# Altium PCB pcb.PcbDoc
Units mm, origin at the board's own origin, x right, y up, seen from the top; angles counter-clockwise.
Board outline 127.89 x 65.53 mm, 2 copper layers (Top Layer, Bottom Layer); 26 components, 39 nets, 112 pads, 23 vias.
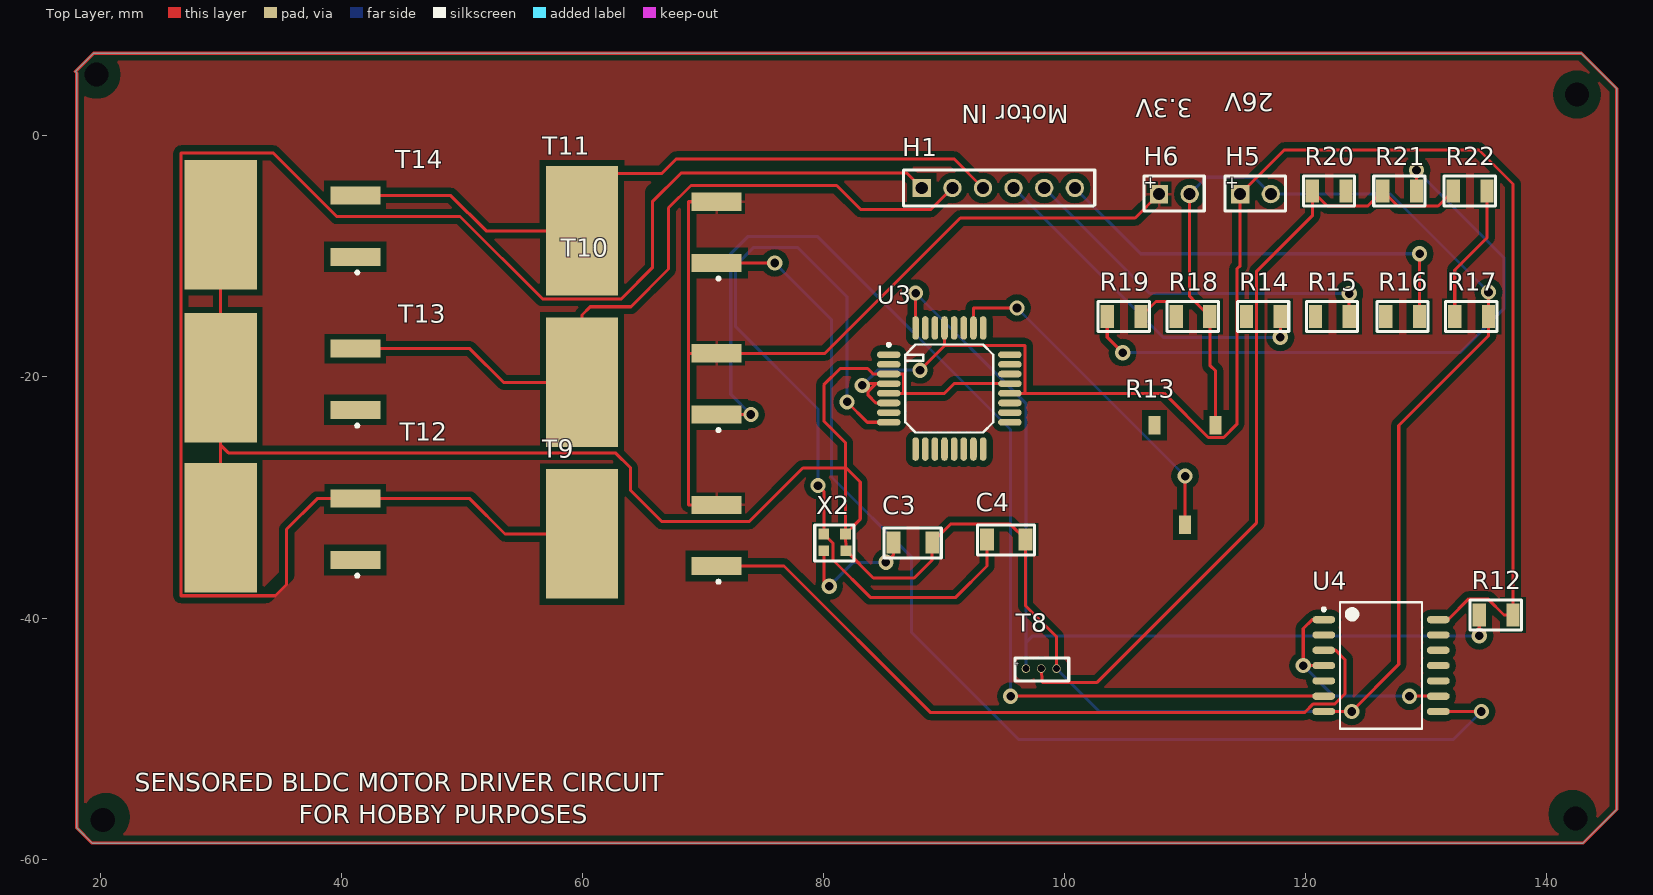
[diagram p0: Top Layer view]
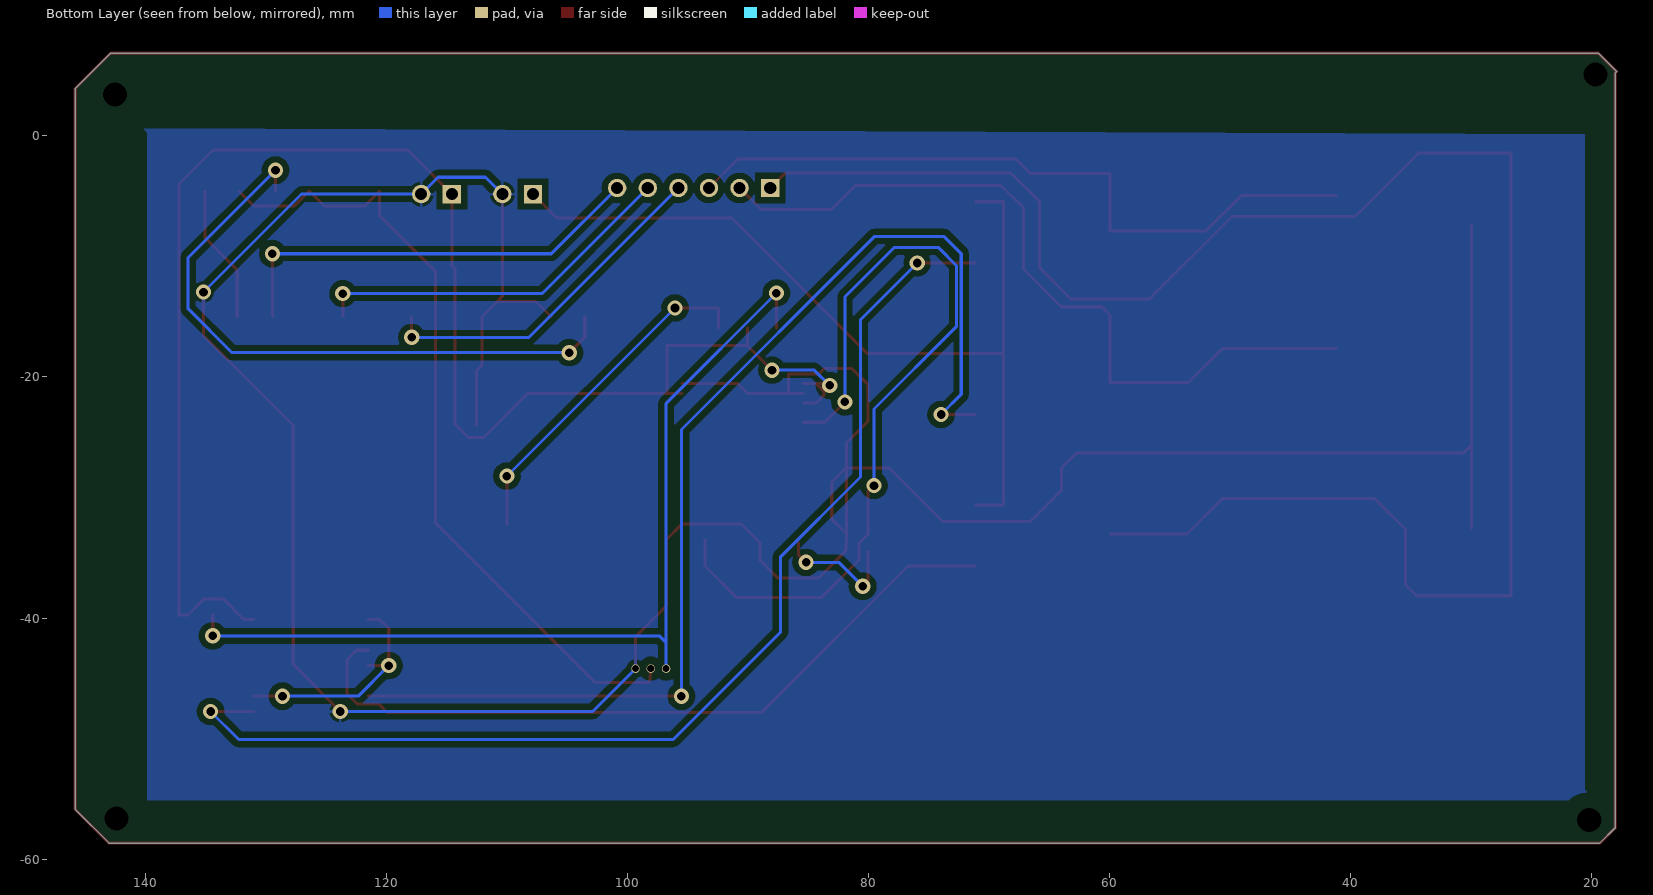
[diagram p1: Bottom Layer view, seen from below]
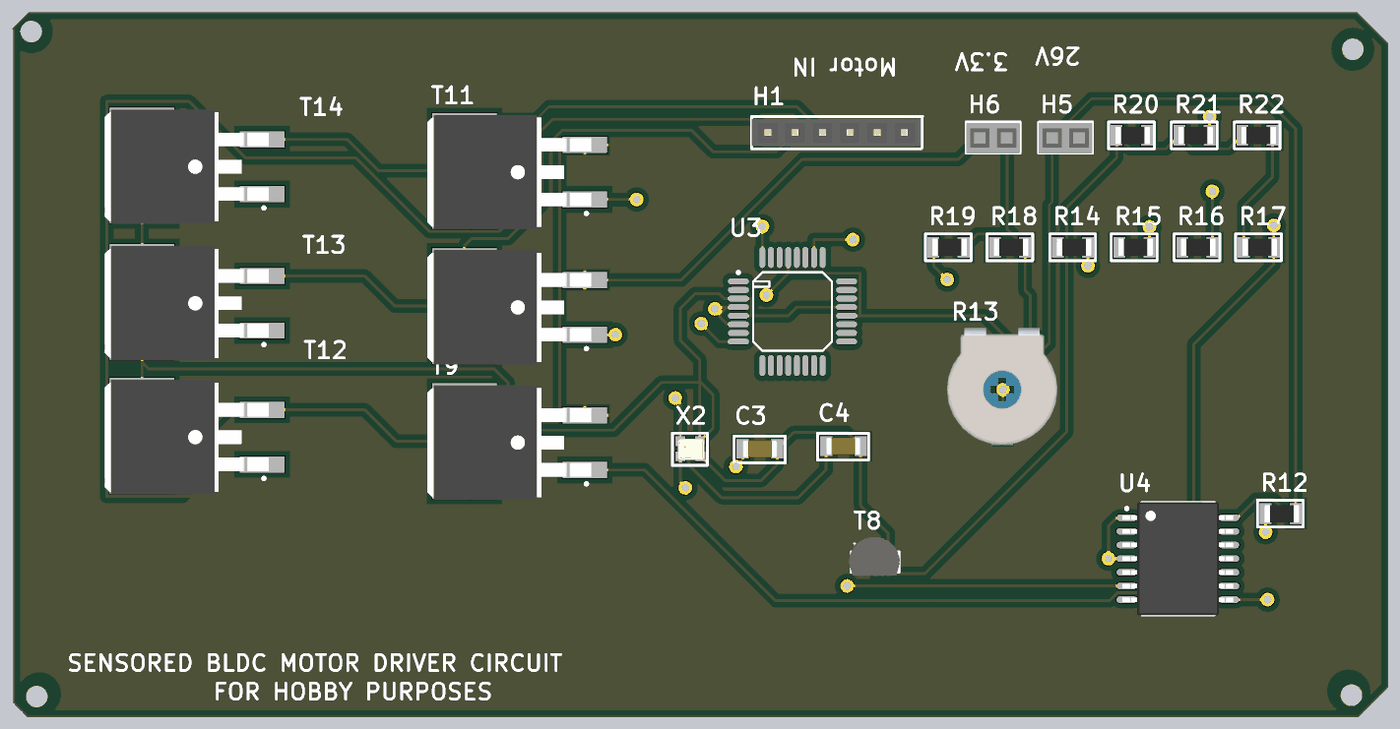
[diagram p2: 3D render of the assembled board from above, using the file's embedded part models]

## Layer stack, top to bottom
Top Solder: solder mask 0.0102, Solder Resist, Dk 3.5
Top Layer: signal copper 0.0356
Dielectric 1: dielectric 0.32, FR-4, Dk 4.8
Bottom Layer: signal copper 0.0356
Bottom Solder: solder mask 0.0102, Solder Resist, Dk 3.5

## Board outline
18.034,-57.404 18.034,5.207 17.907,5.334 19.431,6.858 142.875,6.858 145.796,3.937 145.796,-55.88 143.002,-58.674 19.304,-58.674

## Design rules (kind name [scope] priority, off if disabled: settings)
Clearance [All] p1: gap=0.5 ignorepadtopadclearanceinfootprint=FALSE except(0: Arc-Hole Track-Hole SMDPad-Hole THPad-Hole Via-Hole Fill-Hole Poly-Hole Region-Hole Text-Hole; 0.128: Arc-Arc Arc-Track Arc-SMDPad Track-Track Track-SMDPad SMDPad-SMDPad THPad-THPad)
MinimumSolderMaskSliver [All] p1: minsoldermaskwidth=0.1
PolygonConnect [All] p1: connectstyle=Relief reliefconductorwidth=0.254 reliefentries=4 polygonreliefangle="90 Angle" airgapwidth=0.254
RoutingVias [All] p1: holewidth=0.711 width=1.27 viastyle="Through Hole" minholewidth=0.711 minwidth=1.27 maxholewidth=0.711 maxwidth=1.27
SilkToSilkClearance [All] p1: silktosilkclearance=0
SilkToSolderMaskClearance [IsPad] p1: minsilkscreentomaskgap=0 clearancetoexposedcopper=TRUE
SolderMaskExpansion [All] p1: expansion=0.102
Width [All] p1: maxlimit=0.254 minlimit=0.254 preferedwidth=0.254
27 further rules are at their usual default settings.

## Components (designator, comment, footprint, x,y, rotation, side; value= is the part's Value field where it differs from the comment)
C3 "22pF Smd" "smd cap" 87.503,-33.782 r0 top
C4 "22pF Smd" "smd cap" 95.25,-33.528 r0 top
H1 "header 1x6 2.54mm" "Header 1x6 2.54mm" 88.138,-4.318 r0 top
H5 "header 1x2 2.54mm" "HEADER 1X2 2.54mm" 114.554,-4.826 r0 top
H6 "header 1x2 2.54mm" "HEADER 1X2 2.54mm" 107.823,-4.826 r0 top
R12 "10K Res" "smd res" 135.636,-39.751 r0 top
R13 "1k  POT" "smd trimpot" 109.982,-27.813 r0 top
R14 "RES 1K" "smd res" 116.332,-14.986 r0 top
R15 "RES 1K" "smd res" 122.047,-14.986 r0 top
R16 "RES 1K" "smd res" 127.889,-14.986 r0 top
R17 "RES 1K" "smd res" 133.604,-14.986 r0 top
R18 "RES 1K" "smd res" 110.49,-14.986 r0 top
R19 "RES 1K" "smd res" 104.775,-14.986 r0 top
R20 "RES 1K" "smd res" 121.793,-4.572 r0 top
R21 "RES 1K" "smd res" 127.635,-4.572 r0 top
R22 "RES 1K" "smd res" 133.477,-4.572 r0 top
T8 "BC547" TO-92 99.822,-43.942 r0 top
T9 "IRF3205" "smd mosfet" 65.024,-33.147 r180 top
T10 "IRF3205" "smd mosfet" 65.024,-20.574 r180 top
T11 "IRF3205" "smd mosfet" 65.024,-8.001 r180 top
T12 "IRF3205" "smd mosfet" 35.052,-32.639 r180 top
T13 "IRF3205" "smd mosfet" 35.052,-20.193 r180 top
T14 "IRF3205" "smd mosfet" 35.052,-7.493 r180 top
U3 "atmega328p" atmega238p 90.424,-20.955 r0 top
U4 "74hc08 and gate" SOIC127P1030X265-14N 126.238,-43.942 r0 top
X2 "XTAL" xtal 80.76,-33.897 r0 top

## Footprints (in the part's own frame and the unit in brackets; to place one, negate y for a bottom-side part, rotate by r counter-clockwise, add the part's x,y. Pads: shape width x height; smd on the part's side, far side on the other; paste and mask are expansions set on the pad)
atmega238p [mm] "CQFP, 32-Leads, Body 11,15x11,15mm, Pitch 0,80mm, IPC Medium Density"
  oval 1.95x0.55 smd mask+0.05: 1(-5.025,2.8) 2(-5.025,2) 3(-5.025,1.2) 4(-5.025,0.4) 5(-5.025,-0.4) 6(-5.025,-1.2) 7(-5.025,-2) 8(-5.025,-2.8) 17(5.025,-2.8) 18(5.025,-2) 19(5.025,-1.2) 20(5.025,-0.4) 21(5.025,0.4) 22(5.025,1.2) 23(5.025,2) 24(5.025,2.8)
  oval 0.55x1.95 smd mask+0.05: 9(-2.8,-5.025) 10(-2,-5.025) 11(-1.2,-5.025) 12(-0.4,-5.025) 13(0.4,-5.025) 14(1.2,-5.025) 15(2,-5.025) 16(2.8,-5.025) 25(2.8,5.025) 26(2,5.025) 27(1.2,5.025) 28(0.4,5.025) 29(-0.4,5.025) 30(-1.2,5.025) 31(-2,5.025) 32(-2.8,5.025)
  silkscreen extent -5.15,-3.65 3.65,3.75, body extent -3.5,-3.5 3.5,3.5, height 1.2
"HEADER 1X2 2.54mm" [mil]
  rect 60x60 hole 39.37: 1(0,0)
  round 60 hole 39.37: 2(100,0)
  silkscreen extent -49,-56 148,59, body extent -49,-56 148,56, height 335
"Header 1x6 2.54mm" [mil]
  rect 60x60 hole 39.37: 1(0,0)
  round 60 hole 39.37: 2(100,0) 3(200,0) 4(300,0) 5(400,0) 6(500,0)
  silkscreen extent -59,-59 566,59, body extent -60,-50 560,50, height 413
"smd cap" [mm]
  rect 1.15x1.8 smd: 1(-1.7,0.05) 2(1.5,0.05)
  silkscreen extent -2.5,-1.25 2.25,1.25, body extent -1.7,-0.75 1.5,0.85, height 0.88
"smd mosfet" [mm] "D2-PAK, 3-Pads, Body 7,91x8,70mm (max), IPC Medium Density"
  rect 4.15x1.5 smd paste+0 mask+0.1: 1(-6.096,2.54)
  rect 4.15x1.5 smd: 2(-6.096,-2.54)
  rect 6x10.75 smd: 3(5.08,-0.127)
  silkscreen extent -6.38,3.72 -6.13,3.96, body extent -6.7,-5.33 8.54,5.33, height 2.51
"smd res" [mm]
  rect 1.1x1.93 smd: 1(-1.25,0) 2(1.55,0)
  silkscreen extent -2,-1.25 2.25,1.25, body extent -1.35,-0.8 1.85,0.8, height 0.6
"smd trimpot" [mm]
  rect 1x1.521 smd: 1(-2.54,3.81) 2(2.54,3.81) 3(0,-4.445)
  body extent -5.22,-5.56 5.08,5.33, height 6.6
SOIC127P1030X265-14N [mm] "SOIC, 14-Leads, Body 10,30x7,50mm, Pitch 1,27mm, IPC Medium Density"
  oval 1.9x0.6 smd: 1(-4.75,3.81) 2(-4.75,2.54) 3(-4.75,1.27) 4(-4.75,0) 5(-4.75,-1.27) 6(-4.75,-2.54) 7(-4.75,-3.81) 8(4.75,-3.81) 9(4.75,-2.54) 10(4.75,-1.27) 11(4.75,0) 12(4.75,1.27) 13(4.75,2.54) 14(4.75,3.81)
  silkscreen extent -4.87,-5.25 3.4,5.25, body extent -5.15,-5.25 5.15,5.25, height 2.65
TO-92 [mm]
  round 0.7 hole 0.6: 1(-3.048,-0.254) 2(-1.778,-0.254) 3(-0.508,-0.254)
  silkscreen extent -3.94,-1.27 0.51,0.64, body extent -4.16,-1.6 0.6,2.03, height 6.83
xtal [mm]
  rect 0.9x0.9 smd: 1(-0.75,-0.523) 2(1.1,-0.523) 3(-0.75,0.877) 4(1.05,0.877)
  silkscreen extent -1.5,-1.37 1.75,1.63, body extent -1,-0.87 1.5,1.13, height 0.65

## Part data
R12: "10K SMD Res"
R14 R15 R16 R17 R18 R19 R20 R21 R22: "1K Res"
X2: "16MHz Xtal"

## Free pads (board coordinates)
  round 1.524 hole 2: 2(19.685,5.08) 3(20.193,-56.769) 4(142.367,-56.642) 5(142.494,3.429)

## Via types
v1: diameter 1.27, hole 0.711, Top Layer to Bottom Layer, 23 vias

## Nets (pads, with @x,y where several pads share a name; then routed paths per layer and width w, separated by ;. In a path a pad name is that pad's centre, name@x,y a point inside that pad or via, vN(x,y) a via of type N, cw(c..) or ccw(c..) an arc to the next point about the centre after c; other vN are vias at no path point)
3.3V: H5.1 R12.2 U3.4 U3.6 U3.20 U3.29 U4.14 | length 134.3
  Top Layer w0.254: v1(83.21,-20.701) 83.356,-20.555 84.328,-20.555 ; U3.6 84.328,-22.155 83.693,-21.52 83.693,-21.19 84.328,-20.555 ; U3.4 84.328,-20.555 ; v1(87.992,-19.431) 90.024,-17.399 ; U3.29 90.024,-17.399 ; U3.20 96.672,-21.355 96.698,-21.355 ; U4.14 131.801,-40.132 133.528,-38.405 135.103,-38.405 136.449,-39.751 R12.2 137.186,-3.988 134.366,-1.168 118.212,-1.168 H5.1 114.554,-10.77 114.275,-11.049 114.275,-23.927 113.182,-25.019 111.912,-25.019 108.248,-21.355 96.698,-21.355 ; 90.024,-17.399 96.698,-17.399 96.698,-21.355
  Bottom Layer w0.254: v1(83.21,-20.701) 84.48,-19.431 v1(87.992,-19.431)
5V: R13.1
26V: H6.1 T9.2 T10.2 T11.2 | length 74.3
  Top Layer w0.254: T9.2 68.783,-30.607 68.783,-18.034 ; T11.2 68.783,-5.461 68.783,-18.034 ; H6.1 105.842,-6.807 91.338,-6.807 80.112,-18.034 T10.2 68.783,-18.034
BackemfA: R20.2
BackemfB: R19.1 R21.2 | length 52.9
  Top Layer w0.254: R19.1 103.525,-16.708 v1(104.8,-17.983) ; R21.2 v1(129.185,-2.845)
  Bottom Layer w0.254: v1(104.8,-17.983) 132.791,-17.983 136.423,-14.351 136.423,-10.083 v1(129.185,-2.845)
BackemfC: R17.1 R22.2 | length 11.5
  Top Layer w0.254: R17.1 132.354,-11.125 135.027,-8.452 R22.2
GND: C3.2 C4.2 H5.2 H6.2 R13.2 R17.2 R18.2 R19.2 T8.3 T12.3 T13.3 T14.3 U3.3 U3.5 U3.21 U4.7 X2.2 X2.4 | length 275.9
  Top Layer w0.254: T12.3 29.972,-25.654 ; T14.3 T13.3 29.972,-25.654 ; U3.5 86.639,-21.355 ; U3.21 90.818,-20.555 90.018,-21.355 86.639,-21.355 ; T8.3 99.314,-41.553 96.75,-38.989 C4.2 95.479,-32.207 90.528,-32.207 C3.2 89.003,-35.179 87.504,-36.678 84.118,-36.678 X2.2 81.86,-33.757 81.81,-33.707 X2.4 ; R19.2 107.57,-13.741 110.795,-13.741 ; H6.2 110.363,-13.309 110.795,-13.741 ; R13.2 112.522,-19.507 112.04,-19.025 R18.2 110.795,-13.741 ; U4.7 v1(123.8,-47.752) 127.711,-43.84 127.711,-24.028 135.154,-16.586 R17.2 v1(135.154,-12.955) ; 29.972,-25.654 30.607,-26.289 62.713,-26.289 63.983,-27.559 63.983,-29.413 66.563,-31.994 73.822,-31.994 78.27,-27.546 81.81,-27.546 ; X2.4 81.81,-27.546 ; X2.4 83.033,-31.797 83.033,-28.71 81.869,-27.546 81.81,-27.546 ; 81.81,-27.546 81.81,-25.447 80.01,-23.647 80.01,-20.656 81.362,-19.304 83.648,-19.304 84.099,-19.755 U3.3 86.639,-19.755 86.639,-21.355
  Bottom Layer w0.254: T8.3 102.87,-47.752 v1(123.8,-47.752) ; H6.2 111.76,-3.429 115.697,-3.429 H5.2 127.025,-4.826 v1(135.154,-12.955)
HA: T9.1 U4.3 | length 62.7
  Top Layer w0.254: T9.1 76.708,-35.687 88.875,-47.854 119.888,-47.854 120.625,-47.117 122.428,-47.117 123.241,-46.304 123.241,-43.434 122.479,-42.672 U4.3
HB: T10.1 U4.6 | length 95.4
  Top Layer w0.254: T10.1 v1(73.965,-23.114) ; v1(95.504,-46.482) U4.6
  Bottom Layer w0.254: v1(73.965,-23.114) 72.288,-21.438 72.288,-9.779 73.736,-8.331 79.477,-8.331 95.504,-24.359 v1(95.504,-46.482)
HC: T11.1 U4.8 | length 95.7
  Top Layer w0.254: T11.1 v1(75.946,-10.541) ; U4.8 v1(134.569,-47.752)
  Bottom Layer w0.254: v1(75.946,-10.541) 80.645,-15.24 80.645,-28.296 87.3,-34.95 87.3,-41.199 96.164,-50.063 132.258,-50.063 v1(134.569,-47.752)
IO8: U4.2
IO10: U4.5
IO12: U4.10
LA: T12.1
LB: T13.1
LC: T14.1
NetC3_1: C3.1 X2.1 | length 10.6
  Top Layer w0.254: X2.1 80.01,-36.906 v1(80.467,-37.363) ; v1(85.166,-35.382) 85.803,-34.745 C3.1
  Bottom Layer w0.254: v1(80.467,-37.363) 82.448,-35.382 v1(85.166,-35.382)
NetC4_1: C4.1 U3.8 X2.3 | length 69.6
  Top Layer w0.254: v1(79.527,-29.007) 80.01,-29.489 X2.3 80.772,-33.782 80.772,-35.179 83.871,-38.278 90.959,-38.278 93.55,-35.687 C4.1 ; v1(81.94,-22.073) 83.623,-23.755 U3.8
  Bottom Layer w0.254: v1(79.527,-29.007) 79.527,-22.657 72.695,-15.824 72.695,-10.744 74.168,-9.271 77.876,-9.271 81.94,-13.335 v1(81.94,-22.073)
NetH1_1: H1.1 T9.3 T12.2 | length 151.7
  Top Layer w0.254: T9.3 53.569,-33.02 50.648,-30.099 T12.2 37.973,-30.099 35.433,-32.639 35.433,-37.236 34.519,-38.151 26.695,-38.151 26.695,-1.422 34.341,-1.422 39.599,-6.68 49.835,-6.68 56.667,-13.513 63.221,-13.513 65.786,-10.947 65.786,-5.461 68.174,-3.073 86.893,-3.073 H1.1
NetH1_2: H1.2 T10.3 T13.2 | length 65.3
  Top Layer w0.254: T13.2 50.648,-17.653 53.442,-20.447 T10.3 59.944,-14.859 60.63,-14.173 64.008,-14.173 67.132,-11.049 67.132,-5.969 68.986,-4.115 81.077,-4.115 83.058,-6.096 88.9,-6.096 H1.2
NetH1_3: H1.3 T11.3 T14.2 | length 59.5
  Top Layer w0.254: T14.2 49.073,-4.953 51.994,-7.874 T11.3 59.944,-3.124 66.573,-3.124 67.793,-1.905 90.805,-1.905 H1.3
NetH1_4: H1.4 R14.2 | length 29
  Top Layer w0.254: v1(117.881,-16.713) R14.2
  Bottom Layer w0.254: H1.4 108.153,-16.713 v1(117.881,-16.713)
NetH1_5: H1.5 R15.2 | length 30.8
  Top Layer w0.254: R15.2 v1(123.597,-13.081)
  Bottom Layer w0.254: H1.5 107.061,-13.081 v1(123.597,-13.081)
NetH1_6: H1.6 R16.2 | length 36.1
  Top Layer w0.254: R16.2 v1(129.439,-9.779)
  Bottom Layer w0.254: H1.6 106.299,-9.779 v1(129.439,-9.779)
NetR12_1: R12.1 T8.1 U3.32 | length 77.4
  Top Layer w0.254: U3.32 v1(87.624,-13.036) ; R12.1 134.386,-41.473 v1(134.391,-41.478)
  Bottom Layer w0.254: v1(87.624,-13.036) 96.774,-22.186 96.774,-42.037 ; T8.1 96.774,-42.037 ; v1(134.391,-41.478) 97.333,-41.478 96.774,-42.037
NetR13_3: R13.3 U3.26 | length 29
  Top Layer w0.254: U3.26 92.424,-14.275 v1(96.037,-14.275) ; R13.3 v1(109.982,-28.219)
  Bottom Layer w0.254: v1(96.037,-14.275) v1(109.982,-28.219)
NetR20_1: R20.1 R21.1 R22.1 T8.2 | length 67.6
  Top Layer w0.254: T8.2 98.171,-45.339 102.692,-45.339 115.9,-32.131 115.9,-11.272 120.543,-6.629 R20.1 121.788,-5.817 125.14,-5.817 R21.1 127.63,-5.817 130.982,-5.817 R22.1
NetU3_7: U3.7
NetU3_10: U3.10
NetU3_12: U3.12
NetU3_13: U3.13
NetU3_14: U3.14
NetU3_15: U3.15
NetU3_16: U3.16
NetU3_17: U3.17
NetU3_23: U3.23
NetU3_24: U3.24
NetU3_25: U3.25
Speed: U4.1 U4.4 U4.9 | length 19
  Top Layer w0.254: U4.4 v1(119.786,-43.942) 119.786,-40.869 120.523,-40.132 U4.1 ; v1(128.6,-46.482) U4.9
  Bottom Layer w0.254: v1(119.786,-43.942) 122.326,-46.482 v1(128.6,-46.482)
pads on no net: R14.1 R15.1 R16.1 R18.1 U3.1 U3.2 U3.9 U3.11 U3.18 U3.19 U3.22 U3.27 U3.28 U3.30 U3.31 U4.11 U4.12 U4.13
copper on no net: | length 381.6
  Top Layer w0.254: 17.907,5.334 19.431,6.858 142.875,6.858 145.796,3.937 145.796,-55.88 143.002,-58.674 19.304,-58.674 18.034,-57.404 18.034,2.794 18.034,5.207

## Polygon pours and split planes (outlines as drawn)
26V on Top Layer "Top Layer-26V" (solid, pour order 20): 19.431,6.858 17.907,5.334 17.907,-57.277 19.177,-58.547 142.367,-58.547 145.542,-55.372 145.542,4.191 142.621,7.112 90.678,7.112
no net on Top Layer "Top Layer-No Net" (solid, pour order 14): 21.463,0
no net on Top Layer "Top Layer-No Net 1" (solid, pour order 12): 29.21,-0.508
no net on Top Layer "Top Layer-No Net 2" (solid, pour order 10): 29.972,-0.127
no net on Top Layer "Top Layer-No Net 3" (solid, pour order 8): 19.558,0.127
GND on Bottom Layer "Bottom Layer-GND" (solid, pour order 18): 20.574,0.127 20.574,-54.229 20.193,-54.61 20.701,-55.118 139.827,-55.118 139.827,0.254 140.208,0.635

## Silkscreen, mask and mechanical layers (free items; w line width, h text height)
Top Overlay:
  text "26V" at 117.348,3.556 h1.52 r180
  text "3.3V" at 110.617,3.048 h1.52 r180
  text "Motor IN" at 100.33,2.54 h1.52 r180
  text "SENSORED BLDC MOTOR DRIVER CIRCUIT" at 22.86,-54.356 h1.5
  text "FOR HOBBY PURPOSES" at 36.449,-57.023 h1.5

## Text inside footprints (layer, text, board x,y; h text height)
H5: Top Overlay "+" at 113.304,-4.326 h1
H6: Top Overlay "+" at 106.573,-4.326 h1
T8: Top Overlay "+" at 95.885,-43.942 h0.3